# EAGLE board untitled (EAGLE 8.6.3)
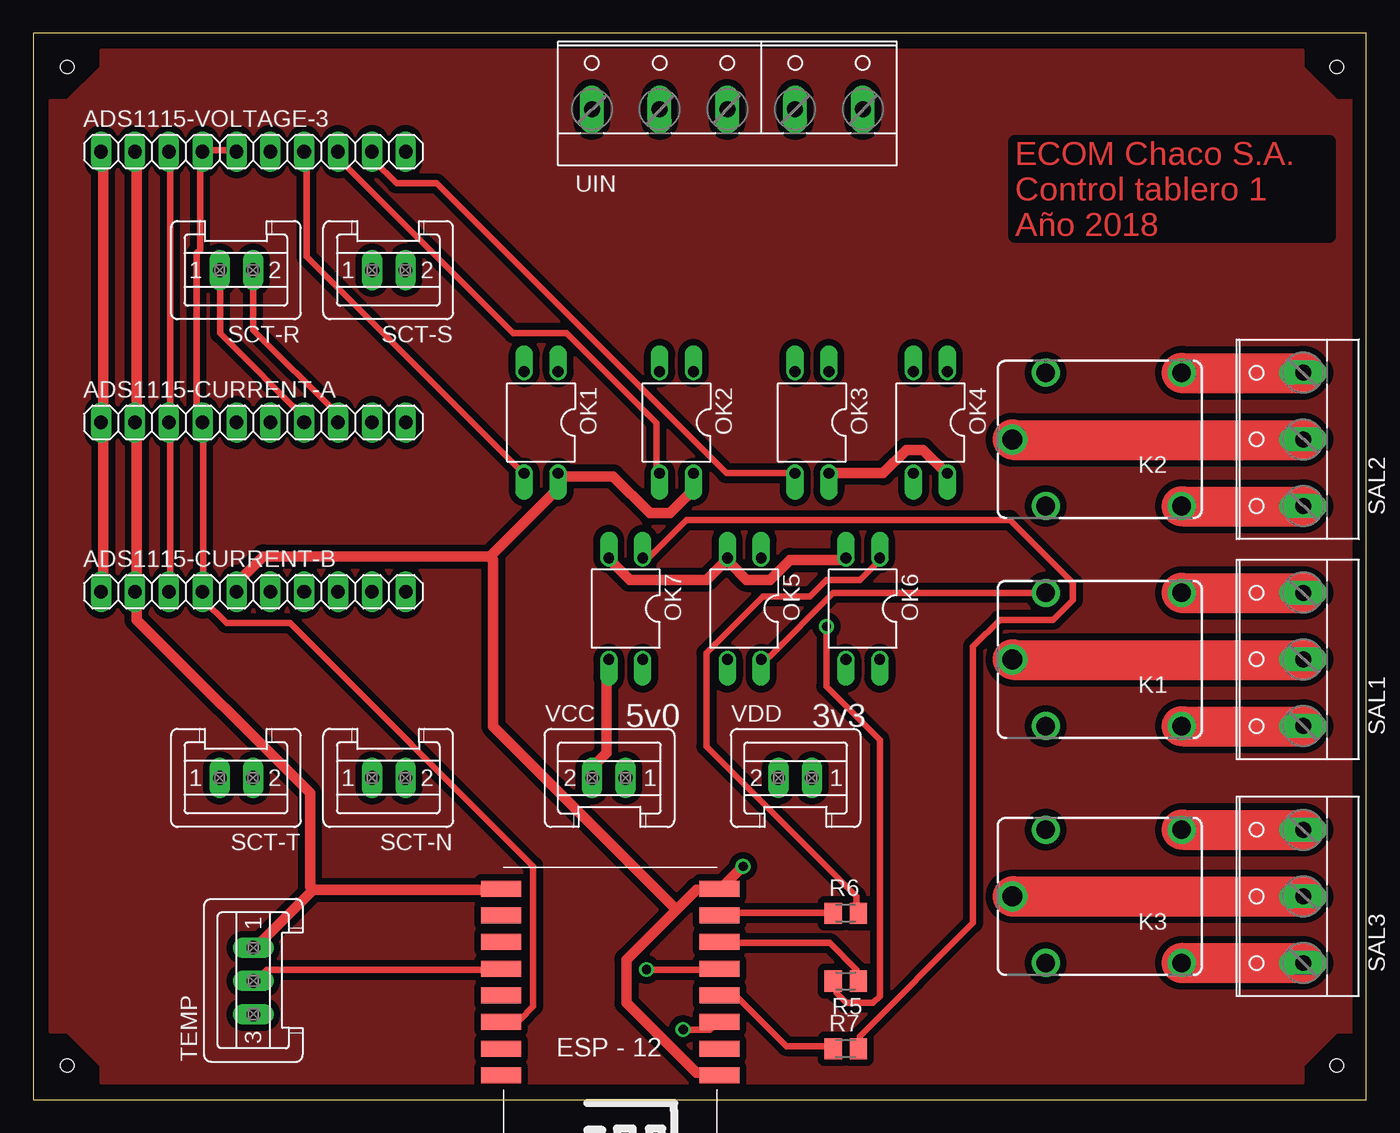
[diagram p0: board, top side]
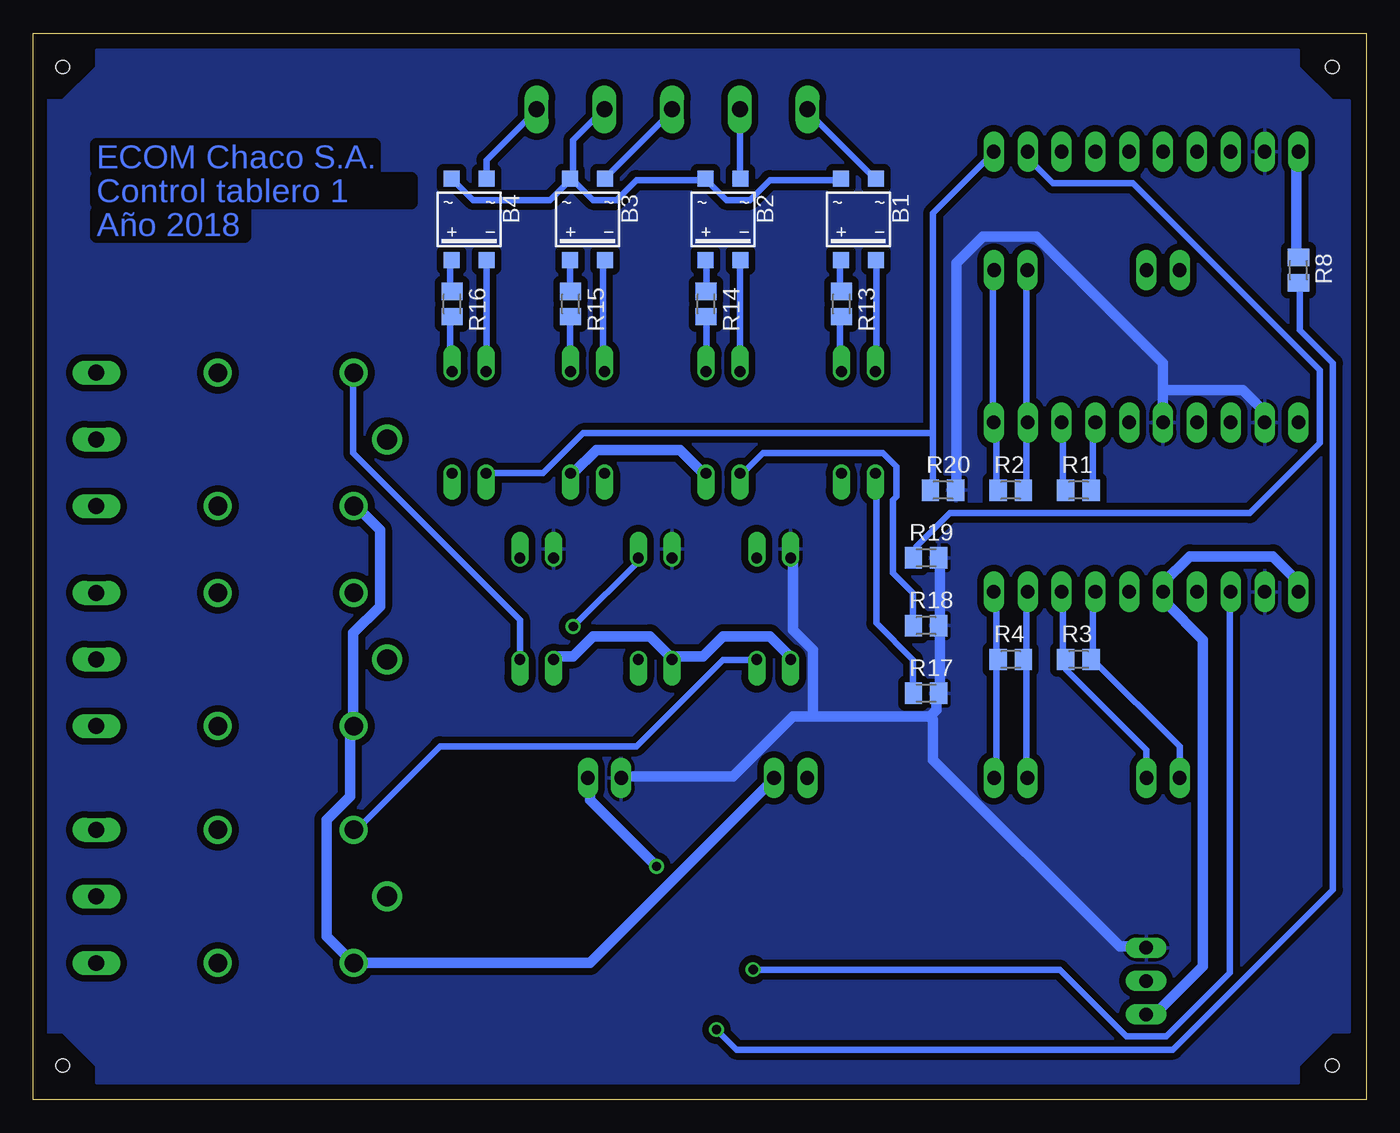
[diagram p1: board, bottom side, seen from below]

Size 100 x 80 mm. Coordinates in mm from the lower left corner, seen from the top.
Outline: 0,0 100,0 100,80 0,80 0,0
Copper layers (1*16): Top 0.035mm / dielectric 1.5mm / Bottom 0.035mm
Design rules "default": minimum track width 6mil, minimum drill 0.35mm, track to track 6mil, track to pad 6mil, pad to pad 6mil, via to via 6mil, smd to smd 6mil, copper to edge 40mil, drill to drill 6mil, minimum pad ring 10mil, minimum via ring 8mil, stop-mask expansion 4mil, vias tented up to drill 0mil, thermal gap 10mil
Net classes: 0 default: width 0.5 mm, drill 0.7 mm, clearance 0.5 mm; 1 source: width 0.8 mm, drill 0.7 mm, clearance 0.5 mm; 2 power: width 3 mm, drill 1 mm, clearance 1 mm
Holes 1 mm at 2.54,2.54 2.54,77.47 97.79,77.47 97.79,2.54

## Footprints (pad centres in the part's own frame; a part is rotated, then mirrored left to right if it is on the bottom)
1X10 = drill 1.016 long: 1 -11.43,0; 2 -8.89,0; 3 -6.35,0; 4 -3.81,0; 5 -1.27,0; 6 1.27,0; 7 3.81,0; 8 6.35,0; 9 8.89,0; 10 11.43,0
SOIC-4 = smd 1.2 x 1.2: + 1.3,3.05; - -1.3,3.05; ~1 -1.3,-3.05; ~2 1.3,-3.05
JJM1C = drill 1.4: 1 4.05,5; 2 4.05,-5; NC -6.15,-5; NO -6.15,5 | drill 1.5: C 6.55,0
DIL04 = drill 0.813 offset: 1 -1.27,-3.81; 2 1.27,-3.81; 3 1.27,3.81; 4 -1.27,3.81
M0805 = smd 1.3 x 1.6: 1 -0.95,0; 2 0.95,0
W237-103 = drill 1.194 long: 1 -5,-1.29; 2 0,-1.29; 3 5,-1.29
S02P = drill 1.016 long: 1 1.25,0; 2 -1.25,0
S03P = drill 1.016 long: 1 2.5,0; 2 0,0; 3 -2.5,0
ESP12-SMD = smd 3 x 1.2: ADC -8.3,3.8; CH_PD -8.3,1.8; GND 8.1,-8.2; GPIO0 8.1,-2.2; GPIO2 8.1,-4.2; GPIO4 8.1,1.8; GPIO5 8.1,-0.2; GPIO12 -8.3,-4.2; GPIO13 -8.3,-6.2; GPIO14 -8.3,-2.2; GPIO15 8.1,-6.2; GPIO16 -8.3,-0.2; RESET -8.3,5.8; RXD0 8.1,3.8; TXD0 8.1,5.8; VCC -8.3,-8.2
W237-5P = drill 1.194 long: 1 -10.16,-0.635; 2 -5.08,-0.635; 3 0,-0.635; 4 5.08,-0.635; 5 10.16,-0.635

## Placement (x,y rotation side)
ADS1115-CURRENT-A  [1X10]  16.51,50.8 0 top
ADS1115-CURRENT-B  [1X10]  16.51,38.1 0 top
ADS1115-VOLTAGE-3  [1X10]  16.51,71.12 0 top
B1  MB2S  [SOIC-4]  38.1,66.04 180 bottom
B2  MB2S  [SOIC-4]  48.26,66.04 180 bottom
B3  MB2S  [SOIC-4]  58.42,66.04 180 bottom
B4  MB2S  [SOIC-4]  67.31,66.04 180 bottom
K1  JJM1-12V  [JJM1C]  80.01,33.02 180 top
K2  JJM1-12V  [JJM1C]  80.01,49.53 180 top
K3  JJM1-12V  [JJM1C]  80.01,15.24 180 top
OK1  PC817  [DIL04]  38.1,50.8 180 top
OK2  PC817  [DIL04]  48.26,50.8 180 top
OK3  PC817  [DIL04]  58.42,50.8 180 top
OK4  PC817  [DIL04]  67.31,50.8 180 top
OK5  PC817  [DIL04]  53.34,36.83 180 top
OK6  PC817  [DIL04]  62.23,36.83 180 top
OK7  PC817  [DIL04]  44.45,36.83 180 top
R1  100  [M0805]  21.59,45.72 0 bottom
R2  100  [M0805]  26.67,45.72 0 bottom
R3  100  [M0805]  21.59,33.02 0 bottom
R4  100  [M0805]  26.67,33.02 0 bottom
R5  10k  [M0805]  60.96,8.89 180 top
R6  10k  [M0805]  60.96,13.97 0 top
R7  10k  [M0805]  60.96,3.81 0 top
R8  1k  [M0805]  5.08,62.23 270 bottom
R13  4M7  [M0805]  39.37,59.69 270 bottom
R14  4M7  [M0805]  49.53,59.69 270 bottom
R15  4M7  [M0805]  59.69,59.69 270 bottom
R16  4M7  [M0805]  68.58,59.69 270 bottom
R17  10k  [M0805]  33.02,30.48 0 bottom
R18  10k  [M0805]  33.02,35.56 0 bottom
R19  10k  [M0805]  33.02,40.64 0 bottom
R20  10k  [M0805]  31.75,45.72 0 bottom
SAL1  [W237-103]  93.98,33.02 90 top
SAL2  [W237-103]  93.98,49.53 90 top
SAL3  [W237-103]  93.98,15.24 90 top
SCT-N  [S02P]  26.67,24.13 180 top
SCT-R  [S02P]  15.24,62.23 180 top
SCT-S  [S02P]  26.67,62.23 180 top
SCT-T  [S02P]  15.24,24.13 180 top
TEMP  [S03P]  16.51,8.89 90 top
U1  [ESP12-SMD]  43.18,7.62 180 top
UIN  [W237-5P]  52.07,74.93 0 top
VCC  [S02P]  43.18,24.13 0 top
VDD  [S02P]  57.15,24.13 0 top

## Library data of the parts
ADS1115-CURRENT-A ADS1115-CURRENT-B ADS1115-VOLTAGE-3 = pinhead
B1-B4 = rectifier
K1-K3 = relay; MF: AROMAT/ MATSUSHITA; MPN: JJM1-12V; OC_FARNELL: unknown; OC_NEWARK: 10C7318
OK1-OK7 = optocoupler; MPN: PC817X4J000F; OC_FARNELL: 9707727; OC_NEWARK: 97K7059
R1-R8 R13-R20 = rcl; SPICEPREFIX: R
SAL1-SAL3 = con-wago-500; MPN: 237-103; OC_FARNELL: unknown; OC_NEWARK: 18M7116
SCT-N SCT-R SCT-S SCT-T TEMP VCC VDD = con-amp-mt; OC_FARNELL: unknown; OC_NEWARK: unknown
U1 = esp8266modules
UIN = con-wago-508; OC_FARNELL: unknown; OC_NEWARK: unknown

## Nets
A10: ADS1115-CURRENT-A.7 R1.2 SCT-R.1
A11: ADS1115-CURRENT-A.8 R1.1 SCT-R.2
A12: ADS1115-CURRENT-A.9 R2.2 SCT-S.1
A13: ADS1115-CURRENT-A.10 R2.1 SCT-S.2
A20: ADS1115-CURRENT-B.7 R3.2 SCT-T.1
A21: ADS1115-CURRENT-B.8 R3.1 SCT-T.2
A22: ADS1115-CURRENT-B.9 R4.2 SCT-N.1
A23: ADS1115-CURRENT-B.10 R4.1 SCT-N.2
A30: ADS1115-VOLTAGE-3.7 OK1.3 R17.1
A31: ADS1115-VOLTAGE-3.8 OK2.3 R18.1
A32: ADS1115-VOLTAGE-3.9 OK3.3 R19.1
A33: ADS1115-VOLTAGE-3.10 OK4.3 R20.1
ALRT1: ADS1115-CURRENT-A.6
ALRT2: ADS1115-CURRENT-B.6
ALRT3: ADS1115-VOLTAGE-3.6
E: B4.~1 UIN.5
GND [source]: ADS1115-CURRENT-A.2 ADS1115-CURRENT-A.5 ADS1115-CURRENT-B.2 ADS1115-VOLTAGE-3.2 OK5.2 OK6.2 OK7.2 R17.2 R18.2 R19.2 R20.2 TEMP.1 U1.GND VDD.2
GND2 [source]: OK5.3 OK6.3 OK7.3 VCC.2
GPIO0: TEMP.2 U1.GPIO0
GPIO12: R5.1 U1.GPIO12
GPIO13: R6.1 U1.GPIO13
GPIO16: R7.1 U1.GPIO16
N: B1.~2 B2.~2 B3.~2 B4.~2 UIN.4
N$1 [power]: K1.C SAL1.2
N$2 [power]: K1.NO SAL1.1
N$3 [power]: K1.NC SAL1.3
N$4: K1.2 OK5.4
N$5: K2.2 OK6.4
N$6: K3.2 OK7.4
N$8: OK5.1 R5.2
N$9: OK2.1 R14.2
N$10: OK1.1 R13.2
N$11: B2.+ R14.1
N$12: B1.+ R13.1
N$13: B1.- OK1.2
N$14: B2.- OK2.2
N$15: OK3.1 R15.2
N$16: B3.+ R15.1
N$17: B3.- OK3.2
N$18: OK4.1 R16.2
N$19: B4.+ R16.1
N$20: B4.- OK4.2
N$21: R8.2 U1.CH_PD
N$23 [power]: K2.NC SAL2.3
N$24 [power]: K2.C SAL2.2
N$25 [power]: K2.NO SAL2.1
N$26 [power]: K3.C SAL3.2
N$27 [power]: K3.NC SAL3.3
N$28 [power]: K3.NO SAL3.1
N$30: OK6.1 R6.2
N$31: OK7.1 R7.2
R: B1.~1 UIN.1
S: B2.~1 UIN.2
SCL: ADS1115-CURRENT-A.3 ADS1115-CURRENT-B.3 ADS1115-VOLTAGE-3.3 U1.GPIO14
SDA: ADS1115-CURRENT-A.4 ADS1115-CURRENT-B.4 ADS1115-VOLTAGE-3.4 ADS1115-VOLTAGE-3.5 U1.GPIO4
T: B3.~1 UIN.3
VCC [source]: K1.1 K2.1 K3.1 VCC.1
VDD [source]: ADS1115-CURRENT-A.1 ADS1115-CURRENT-B.1 ADS1115-CURRENT-B.5 ADS1115-VOLTAGE-3.1 OK1.4 OK2.4 OK3.4 OK4.4 R8.1 TEMP.3 U1.RESET U1.VCC VDD.1

## Tracks (layer width: path | path; a pad name or v marks a point on that pad's centre or on a via)
A10
  Top 0.5: SCT-R.1 14,62 14,57.5 20.5,51 ADS1115-CURRENT-A.7
  Bottom 0.5: R1.2 20.5,45.75 20.5,50.75 ADS1115-CURRENT-A.7
A11
  Top 0.5: SCT-R.2 16.5,62 16.5,57.75 22.75,51.5 22.75,51 ADS1115-CURRENT-A.8
  Bottom 0.5: R1.1 22.75,45.75 22.75,50.75 ADS1115-CURRENT-A.8
A12
  Bottom 0.5: R2.2 25.5,45.75 25.5,50.75 ADS1115-CURRENT-A.9 25.5,51 25.5,62 SCT-S.1
A13
  Bottom 0.5: R2.1 27.75,45.75 27.75,50.75 ADS1115-CURRENT-A.10 28,51 28,62 SCT-S.2
A20
  Bottom 0.5: ADS1115-CURRENT-B.7 20.5,38 20.5,33.25 R3.2 20.5,33 14,26.5 14,24.25 SCT-T.1
A21
  Bottom 0.5: ADS1115-CURRENT-B.8 22.75,38 22.75,33.25 R3.1 22.5,33 22.5,32.25 16.5,26.25 16.5,24.25 SCT-T.2
A22
  Bottom 0.5: ADS1115-CURRENT-B.9 25.5,38 25.5,33.25 R4.2 25.5,33 25.5,24.25 SCT-N.1
A23
  Bottom 0.5: ADS1115-CURRENT-B.10 27.75,38 27.75,33.25 R4.1 27.75,33 27.75,24.25 SCT-N.2
A30
  Top 0.5: ADS1115-VOLTAGE-3.7 20.5,71 20.5,63.25 36.75,47 OK1.3
  Bottom 0.5: R17.1 34,30.5 34,33 36.75,35.75 36.75,46.75 OK1.3
A31
  Top 0.5: ADS1115-VOLTAGE-3.8 23,71 23,70.5 36,57.5 40,57.5 46.75,50.75 46.75,47 OK2.3
  Bottom 0.5: R18.1 34,35.75 34,38 35.5,39.5 35.5,45 35.25,45.25 35.25,47.5 36.25,48.5 45.25,48.5 46.75,47 OK2.3
A32
  Top 0.5: OK3.3 57,47 52,47 30.25,68.75 27.25,68.75 25.5,70.5 25.5,71 ADS1115-VOLTAGE-3.9
  Bottom 0.5: R19.1 33.75,40.75 33.75,41.5 31.25,44 8.75,44 3.5,49.25 3.5,54.75 17.5,68.75 23.5,68.75 25.25,70.5 25.25,71 ADS1115-VOLTAGE-3.9
A33
  Bottom 0.5: 32.5,50 32.5,66.5 28,71 ADS1115-VOLTAGE-3.10 | 32.5,50 32.5,45.75 R20.1 | 32.5,50 58.75,50 61.75,47 66,47 OK4.3
E
  Bottom 0.5: B4.~1 66,69.25 66,70.5 62.25,74.25 UIN.5
GND
  Top 0.8: ADS1115-VOLTAGE-3.2 7.75,71 7.75,51 ADS1115-CURRENT-A.2 7.75,50.75 7.75,38.25 ADS1115-CURRENT-B.2 7.75,37.75 7.75,36 20.75,23 20.75,16 21,15.75 | 21,15.75 35,15.75 U1.GND | 21,15.75 16.75,11.5 TEMP.1 | OK7.2 43.25,40.5 44.75,39 50.5,39 52,40.5 OK5.2 52.25,40.25 53.5,39 55.25,39 56.75,40.5 60.75,40.5 OK6.2
  Bottom 0.8: 15.25,53.25 15.25,51 ADS1115-CURRENT-A.5 | 15.25,53.25 15.25,55.25 24.75,64.75 28.75,64.75 30.75,62.75 30.75,45.75 R20.2 | 15.25,53.25 9.25,53.25 7.75,51.75 7.75,51 ADS1115-CURRENT-A.2 | R19.2 32,40.5 32,35.75 R18.2 32,35.5 32,30.5 R17.2 32.25,30.25 32.25,29.25 32.75,28.75 | 32.75,28.75 41.5,28.75 | 41.5,28.75 43,28.75 47.5,24.25 55.75,24.25 VDD.2 | 41.5,28.75 41.5,33.75 43,35.25 43,40.5 OK7.2 | TEMP.1 16.75,11.5 18.5,11.5 32.5,25.5 32.5,28.5 32.75,28.75
  pour Bottom (isolate 0.406): 1.27,74.93 2.54,74.93 5.08,77.47 5.08,78.74 95.25,78.74 95.25,77.47 97.79,74.93 99.06,74.93 99.06,5.08 97.79,5.08 95.25,2.54 95.25,1.27 5.08,1.27 5.08,2.54 2.54,5.08 1.27,5.08
GND2
  Top 0.8: OK7.3 43,33 43,26 42,25 42,24.25 VCC.2
  Bottom 0.8: OK6.3 60.75,33.25 59.5,33.25 58,34.75 53.75,34.75 52.25,33.25 OK5.3 51.75,33.25 49.75,33.25 48.25,34.75 44.75,34.75 43.25,33.25 OK7.3
GPIO0
  Top 0.5: U1.GPIO0 35,9.75 17.5,9.75 16.75,9 TEMP.2
GPIO12
  Top 0.5: R5.1 61.75,9 61.75,9.75 59.75,11.75 51.5,11.75 U1.GPIO12
GPIO13
  Top 0.5: R6.1 60,14 51.5,14 U1.GPIO13
GPIO16
  Top 0.5: R7.1 60,4 56.5,4 52.75,7.75 51.5,7.75 U1.GPIO16
N
  Bottom 0.5: B1.~2 39.5,69 44.75,69 46.25,67.5 48,67.5 49.5,69 B2.~2 49.75,69 54.75,69 56.25,67.5 58,67.5 59.5,69 B3.~2 | B3.~2 59.5,69.25 59.5,72 57.25,74.25 UIN.4 | B4.~2 68.5,69 67,67.5 61.25,67.5 59.75,69 B3.~2
N$1
  Top 3: SAL1.2 95.25,33 73.5,33 K1.C
N$2
  Top 3: SAL1.1 95.25,28 86.25,28 K1.NO
N$3
  Top 3: SAL1.3 95.25,38 86.25,38 K1.NC
N$4
  Top 0.5: OK5.4 54.75,33.25 55.25,33.25 60,38 75.75,38 K1.2
N$5
  Bottom 0.5: OK6.4 63.5,36 76,48.5 76,54.5 K2.2
N$6
  Bottom 0.5: OK7.4 45.75,33 48.25,33 54.75,26.5 69.5,26.5 75.75,20.25 K3.2
N$7
  pour Top (isolate 0.406): 1.27,74.93 2.54,74.93 5.08,77.47 5.08,78.74 95.25,78.74 95.25,77.47 97.79,74.93 99.06,74.93 99.06,5.08 97.79,5.08 95.25,2.54 95.25,1.27 5.08,1.27 5.08,2.54 2.54,5.08 1.27,5.08
N$8  (via drill 0.7)
  Top 0.5: v59.5,35.5 59.5,31 63.5,27 63.5,7.75 63,7.25 61,7.25 60.25,8 60.25,8.75 R5.2
  Bottom 0.5: v59.5,35.5 54.5,40.5 OK5.1
N$9
  Bottom 0.5: R14.2 49.5,58.5 49.5,54.75 OK2.1
N$10
  Bottom 0.5: R13.2 39.5,58.5 39.5,54.75 OK1.1
N$11
  Bottom 0.5: B2.+ 49.5,62.75 49.5,60.75 R14.1
N$12
  Bottom 0.5: B1.+ 39.5,62.75 39.5,60.75 R13.1
N$13
  Bottom 0.5: B1.- 36.75,62.75 36.75,54.75 OK1.2
N$14
  Bottom 0.5: B2.- 47,62.75 47,54.75 OK2.2
N$15
  Bottom 0.5: R15.2 59.75,58.5 59.75,54.75 OK3.1
N$16
  Bottom 0.5: B3.+ 59.75,62.75 59.75,60.75 R15.1
N$17
  Bottom 0.5: B3.- 57.25,62.75 57.25,54.75 OK3.2
N$18
  Bottom 0.5: R16.2 68.75,58.5 68.75,54.75 OK4.1
N$19
  Bottom 0.5: B4.+ 68.75,62.75 68.75,60.75 R16.1
N$20
  Bottom 0.5: B4.- 66,62.75 66,54.75 OK4.2
N$21  (via drill 0.7)
  Top 0.5: v48.75,5.25 50.75,5.25 51.25,5.75 U1.CH_PD
  Bottom 0.5: v48.75,5.25 47.25,3.75 14.5,3.75 2.5,15.75 2.5,55.25 5,57.75 5,61.25 R8.2
N$23
  Top 3: SAL2.3 95.25,54.5 86.25,54.5 K2.NC
N$24
  Top 3: SAL2.2 95.25,49.5 73.5,49.5 K2.C
N$25
  Top 3: SAL2.1 95.25,44.5 86.25,44.5 K2.NO
N$26
  Top 3: SAL3.2 95.25,15.25 73.5,15.25 K3.C
N$27
  Top 3: SAL3.3 95.25,20.25 86.25,20.25 K3.NC
N$28
  Top 3: SAL3.1 95.25,10.25 86.25,10.25 K3.NO
N$30
  Top 0.5: R6.2 61.75,14 61.75,15.25 50.5,26.5 50.5,33.5 54.75,37.75 58.25,37.75 59.5,39 62,39 63.5,40.5 OK6.1
N$31
  Top 0.5: R7.2 62,4 62,4.75 70.5,13.25 70.5,34 72.5,36 76.5,36 78,37.5 78,38.75 73.25,43.5 49,43.5 46.25,40.75 45.75,40.75 OK7.1
R
  Bottom 0.5: B1.~1 37,69.25 42,74.25 UIN.1
S
  Bottom 0.5: B2.~1 47,69.25 47,74.25 UIN.2
SCL  (via drill 0.7)
  Top 0.5: v46,9.75 51.25,9.75 U1.GPIO14 | ADS1115-CURRENT-B.3 10.25,38.25 10.25,50.75 ADS1115-CURRENT-A.3 10.25,51 10.25,71 ADS1115-VOLTAGE-3.3
  Bottom 0.5: v46,9.75 23,9.75 18,4.75 15,4.75 10.25,9.5 10.25,38 ADS1115-CURRENT-B.3
SDA
  Top 0.5: ADS1115-VOLTAGE-3.5 15,71.25 12.75,71.25 ADS1115-VOLTAGE-3.4 12.5,71 12.5,63.75 12.25,63.5 12.25,51.25 ADS1115-CURRENT-A.4 12.75,50.75 12.75,38.25 ADS1115-CURRENT-B.4 12.75,38 12.75,37.5 14.5,35.75 19.25,35.75 37.5,17.5 37.5,7 36.5,6 35.25,6 U1.GPIO4
T
  Bottom 0.5: B3.~1 57,69.25 52,74.25 UIN.3
VCC
  Bottom 0.8: K2.1 75.75,44.5 74,42.75 74,37 76,35 76,28.25 K1.1 76.25,27.75 76.25,22.75 78,21 78,12.25 76.25,10.5 K3.1 75.75,10.25 58.25,10.25 44.5,24 VCC.1
VDD  (via drill 0.7)
  Top 0.8: 48.25,14.25 49.75,15.75 51.25,15.75 U1.VCC 51.75,16 v53.25,17.5 | 48.25,14.25 44.5,10.5 44.5,7.25 49.75,2 51.25,2 U1.RESET | ADS1115-CURRENT-B.1 5.25,38.25 5.25,50.75 ADS1115-CURRENT-A.1 5.25,51 5.25,71 ADS1115-VOLTAGE-3.1 | OK3.4 59.75,47 63.75,47 65.5,48.75 66.75,48.75 68.5,47 OK4.4 | OK2.4 49.5,46.75 49.5,45.75 47.75,44 46.25,44 43.5,46.75 39.5,46.75 OK1.4 39.25,46.5 39.25,45.75 34.25,40.75 | 34.25,40.75 17.25,40.75 15.25,38.75 15.25,38.25 ADS1115-CURRENT-B.5 | 48.25,14.25 34.5,28 34.5,40.5 34.25,40.75
  Bottom 0.8: v53.25,17.5 58.25,22.5 58.25,24 VDD.1 | R8.1 5.25,63.25 5.25,71 ADS1115-VOLTAGE-3.1 | OK3.4 59.5,47 57.75,48.75 51.5,48.75 49.75,47 OK2.4 | TEMP.3 16.5,6.5 15.75,6.5 12.25,10 12.25,34.5 15,37.25 15,38 ADS1115-CURRENT-B.5 15.25,38.5 15.25,38.75 13.25,40.75 7,40.75 5.25,39 5.25,38.25 ADS1115-CURRENT-B.1

## Text on the board
Top: ECOM Chaco S.A. / Control tablero 1 / Año 2018
Bottom: ECOM Chaco S.A. | Control tablero 1 | Año 2018
tPlace: 5v0 | 3v3